# EAGLE board kicker-v2.2 (EAGLE 9.1.1)
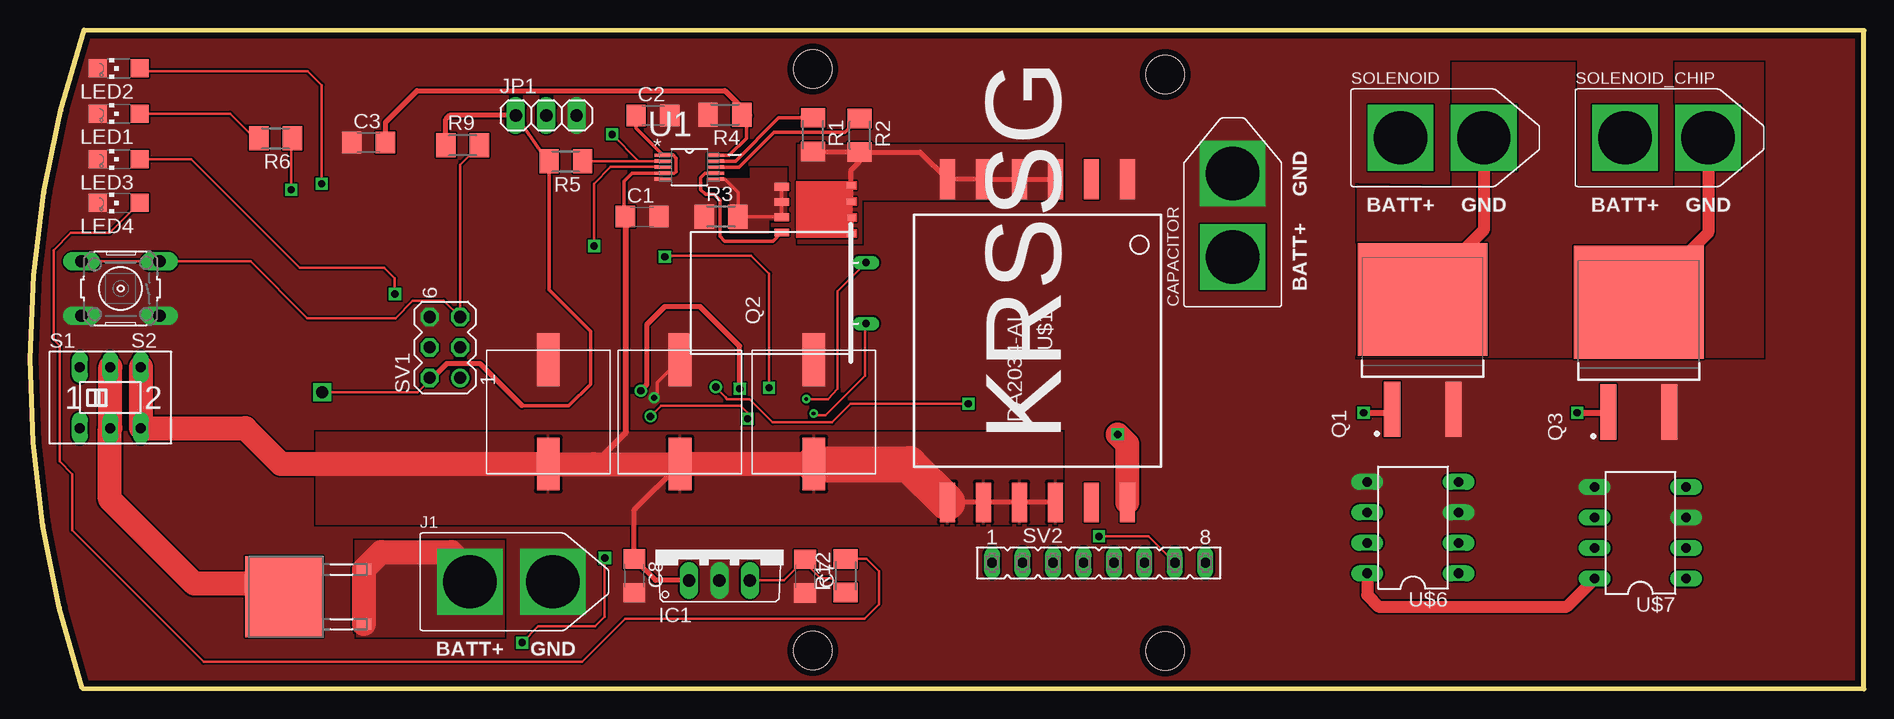
[diagram p0: board, top side]
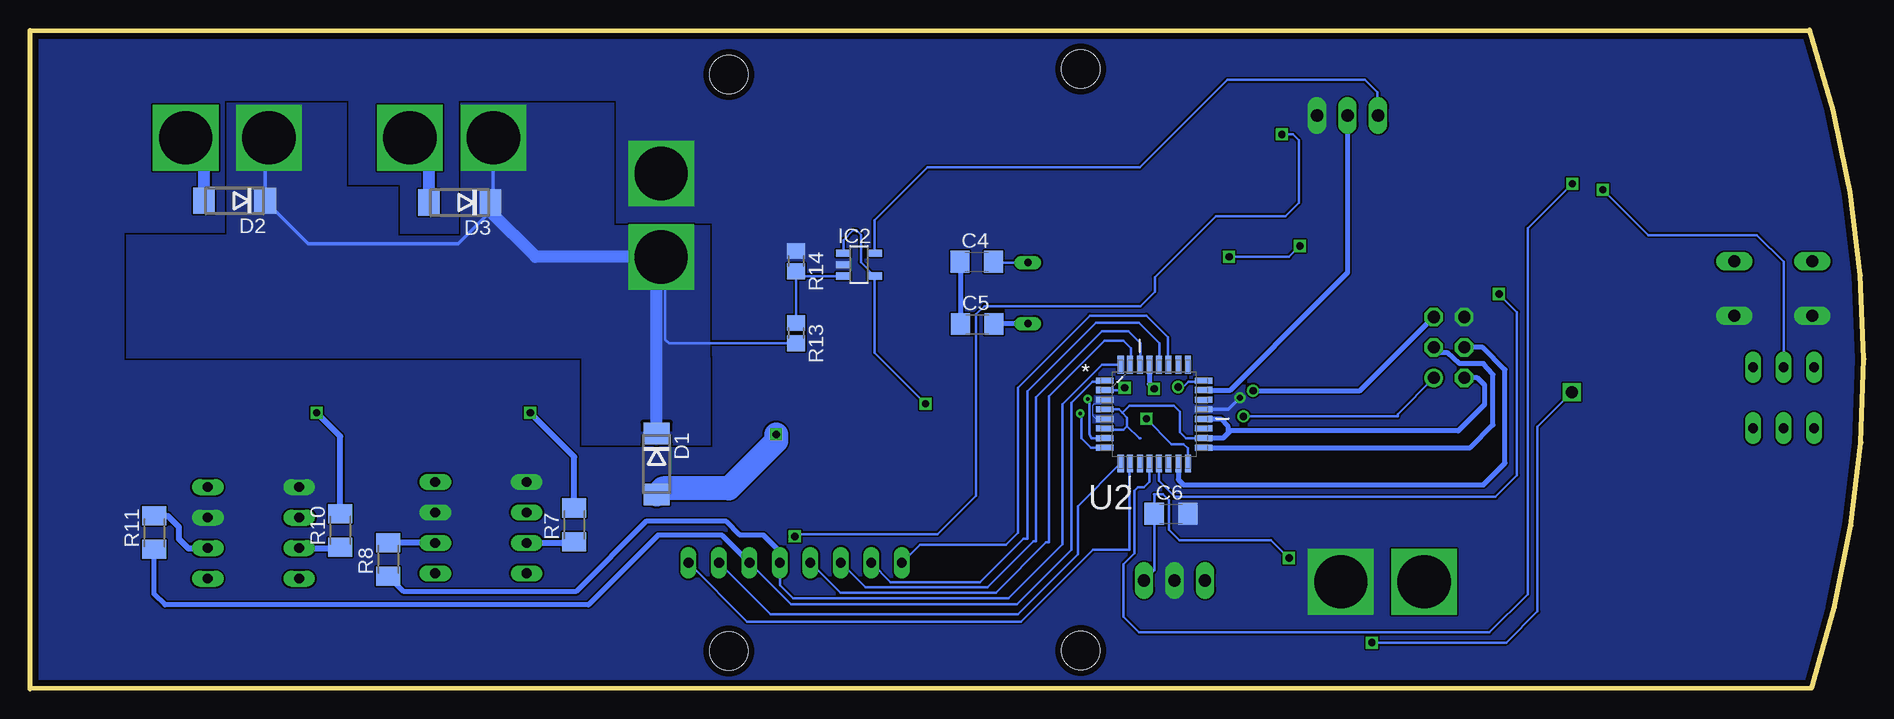
[diagram p1: board, bottom side, seen from below]

Size 152.87 x 54.9 mm. Coordinates in mm from the lower left corner, seen from the top.
Outline: 4.37,0.05 152.87,0 152.87,54.85 4.52,54.9 arc37 4.37,0.05
Copper layers (1*16): Top 0.09mm / dielectric 2.2mm / Bottom 0.09mm
Design rules "default *": minimum track width 10mil, minimum drill 0.15mm, track to track 0.15mm, track to pad 0.15mm, pad to pad 0.15mm, via to via 0.15mm, smd to smd 0.15mm, copper to edge 0.5mm, drill to drill 8mil, minimum pad ring 10mil, minimum via ring 8mil, stop-mask expansion 4mil, vias tented up to drill 0mil, thermal gap 10mil
Holes 3.2 mm at 65.27,3.2 65.27,51.65 94.62,51.2 94.62,3.15

## Footprints (pad centres in the part's own frame; a part is rotated, then mirrored left to right if it is on the bottom)
C1206 = smd 1.6 x 1.8: 1 -1.4,0; 2 1.4,0
XT-60 = drill 4.446 square: BATT 0,4.154; GND 0,11.092
DO214AA = smd 1.8 x 2.2: A 2.55,0; C -2.55,0
TO220V = drill 1.016 long: 1 -2.54,-2.54; 2 0,-2.54; 3 2.54,-2.54
SOT23-5 = smd 0.6 x 1.2: 1 -0.95,-1.306; 2 0,-1.306; 3 0.95,-1.306; 4 0.95,1.306; 5 -0.95,1.306
1X03 = drill 1.016 long: 1 -2.54,0; 2 0,0; 3 2.54,0
CHIPLED_1206 = smd 1.5 x 1.5: A 0,-1.75; C 0,1.75
TO254P1524X457-3N-2-V = smd 4.6 x 1.35: 1 -4.575,2.55; 3 -4.575,-2.55 | smd 9.4 x 10.8: 2 4.575,0
Q = drill 0.61 long: 1 -2.54,-7.62; 2 2.54,-7.62
M1206 = smd 1.6 x 2: 1 -1.4,0; 2 1.4,0
R0805 = smd 1.3 x 1.5: 1 -0.85,0; 2 0.85,0
A68-A31 = drill 0.813 long: 1 -2.54,-2.54; 2 0,-2.54; 3 2.54,-2.54; 4 -2.54,2.54; 5 0,2.54; 6 2.54,2.54
B3F-10XX = drill 1.016 long: 1 -3.251,2.261; 2 3.251,2.261; 3 -3.251,-2.261; 4 3.251,-2.261
MA03-2 = drill 1.016: 1 -2.54,-1.27 | drill 1.016 octagon: 2 -2.54,1.27; 3 0,-1.27; 4 0,1.27; 5 2.54,-1.27; 6 2.54,1.27
FE08 = drill 0.813 long: 1 -8.89,0; 2 -6.35,0; 3 -3.81,0; 4 -1.27,0; 5 1.27,0; 6 3.81,0; 7 6.35,0; 8 8.89,0
SOP50P490X110-10N = smd 1.397 x 0.279: 1 -2.184,0.991; 2 -2.184,0.508; 3 -2.184,0; 4 -2.184,-0.508; 5 -2.184,-0.991; 6 2.184,-0.991; 7 2.184,-0.508; 8 2.184,0; 9 2.184,0.508; 10 2.184,0.991
QFP80P900X900X120-32N = smd 1.473 x 0.508: 1 -4.115,2.794; 2 -4.115,2.007; 3 -4.115,1.194; 4 -4.115,0.406; 5 -4.115,-0.406; 6 -4.115,-1.194; 7 -4.115,-2.007; 8 -4.115,-2.794; 17 4.115,-2.794; 18 4.115,-2.007; 19 4.115,-1.194; 20 4.115,-0.406; 21 4.115,0.406; 22 4.115,1.194; 23 4.115,2.007; 24 4.115,2.794 | smd 0.508 x 1.473: 9 -2.794,-4.115; 10 -2.007,-4.115; 11 -1.194,-4.115; 12 -0.406,-4.115; 13 0.406,-4.115; 14 1.194,-4.115; 15 2.007,-4.115; 16 2.794,-4.115; 25 2.794,4.115; 26 2.007,4.115; 27 1.194,4.115; 28 0.406,4.115; 29 -0.406,4.115; 30 -1.194,4.115; 31 -2.007,4.115; 32 -2.794,4.115
TO228P1042X238-3N = smd 0.889 x 1.219: 1 -2.286,-6.502; 3 2.286,-6.502 | smd 6.731 x 6.502: 2 0,0.152
DA2034-AL = smd 3.3 x 1.27: P$1 -13.46,7.5; P$2 -13.46,4.5; P$3 -13.46,1.5; P$4 -13.46,-1.5; P$5 -13.46,-4.5; P$6 -13.46,-7.5; P$7 13.46,-7.5; P$8 13.46,-4.5; P$9 13.46,-1.5; P$10 13.46,1.5; P$11 13.46,4.5; P$12 13.46,7.5
SVP_F12 = smd 1.9 x 4.4: + 5.15,-0.8; - 5.15,-9.5
PG-TDSON-8 = smd 0.5 x 0.7: D1 -0.12,5.78; D2 1.25,5.75; D3 2.58,5.81; D4 3.9,5.79 | smd 0.65 x 1.2: G 3.81,0; S1 0,0; S2 1.27,0; S3 2.54,0
DIL08 = drill 0.813 long: 1 -3.81,-3.81; 2 -1.27,-3.81; 3 1.27,-3.81; 4 3.81,-3.81; 5 3.81,3.81; 6 1.27,3.81; 7 -1.27,3.81; 8 -3.81,3.81

## Placement (x,y rotation side)
C1  10uF  [C1206]  51.03,39.35 0 top
C2  10uF  [C1206]  51.93,47.79 0 top
C3  100pF  [C1206]  28.23,45.54 0 top
C4  10uF  [C1206]  73.96,35.59 0 bottom
C5  10uF  [C1206]  73.91,30.39 0 bottom
C6  10uF  [C1206]  57.76,14.59 0 bottom
C7  10uF  [C1206]  64.61,9.39 270 top
C8  10uF  [C1206]  50.37,9.41 270 top
CAPACITOR  XT-60BATT_LABEL  [XT-60]  100.26,31.84 0 top
D1  [DO214AA]  100.64,18.73 270 bottom
D2  [DO214AA]  135.82,40.67 180 bottom
D3  [DO214AA]  117.06,40.52 180 bottom
IC1  7818TV  [TO220V]  57.47,11.57 0 top
IC2  MCP601OT  [SOT23-5]  83.77,35.35 270 bottom
J1  XT-60BATT_LABEL  [XT-60]  32.51,8.92 270 top
JP1  [1X03]  43.04,47.78 0 top
LED1  [CHIPLED_1206]  7.39,47.93 90 top
LED2  [CHIPLED_1206]  7.39,51.7 90 top
LED3  [CHIPLED_1206]  7.39,44.12 90 top
LED4  [CHIPLED_1206]  7.39,40.49 90 top
Q1  IGB50N60T  [TO254P1524X457-3N-2-V]  116.09,27.87 90 top
Q2  [Q]  62.07,32.98 90 top
Q3  IGB50N60T  [TO254P1524X457-3N-2-V]  134.11,27.64 90 top
R1  60.4K  [M1206]  65.27,46.18 270 top
R2  43K  [M1206]  69.17,46.13 270 top
R3  8m  [M1206]  57.61,39.35 0 top
R4  2.49K  [M1206]  57.93,47.85 180 top
R5  100K  [M1206]  44.67,43.95 180 top
R6  [M1206]  20.48,45.87 180 top
R7  [M1206]  107.5,13.66 90 bottom
R8  [M1206]  123,10.78 90 bottom
R9  [M1206]  36.07,45.28 0 top
R10  [M1206]  127,13.2 90 bottom
R11  [M1206]  142.5,13.02 90 bottom
R12  [M1206]  67.99,9.42 90 top
R13  [R0805]  89.02,29.65 270 bottom
R14  [R0805]  89.02,35.65 270 bottom
S1  [A68-A31]  6.7,24.26 0 top
S2  [B3F-10XX]  7.55,33.36 180 top
SOLENOID  XT-60BATT_LABEL  [XT-60]  110.1,45.92 270 top
SOLENOID_CHIP  XT-60BATT_LABEL  [XT-60]  128.8,45.92 270 top
SV1  [MA03-2]  34.59,28.45 90 top
SV2  [FE08]  89.09,10.5 0 top
U1  LT3750EMSPBF  [SOP50P490X110-10N]  54.97,43.47 0 top
U2  ATMEGA328P-AU  [QFP80P900X900X120-32N]  59.16,22.89 0 bottom
U3  [TO228P1042X238-3N]  21.35,7.67 90 top
U$1  DA2034-AL  [DA2034-AL]  83.98,29 270 top
U$2  56uF  [SVP_F12]  59.33,17.93 180 top
U$3  56uF  [SVP_F12]  48.36,17.93 180 top
U$4  56uF  [SVP_F12]  70.49,17.93 180 top
U$5  BSC520N  [PG-TDSON-8]  62.67,41.84 270 top
U$6  HCPL-3120-300E  [DIL08]  115.28,13.43 90 top
U$7  HCPL-3120-300E  [DIL08]  134.24,13 90 top

## Library data of the parts
C1-C8 R1-R14 = resistor
CAPACITOR J1 SOLENOID SOLENOID_CHIP = XT-60
D1-D3 = diode
IC1 IC2 = linear
JP1 = pinhead
LED1-LED4 = led
Q1 Q3 = IGB50N60T
Q2 = special
S1 = switch
S2 = switch-omron; MPN: B3F-1000; OC_FARNELL: 176432; OC_NEWARK: 36M3542
SV1 = con-lstb; OC_FARNELL: unknown; OC_NEWARK: unknown
SV2 = con-lsta; OC_FARNELL: unknown; OC_NEWARK: unknown
U1 = LT3750-element; MPN: LT3750EMS#PBF; OC_FARNELL: 1273500; OC_NEWARK: 57M8591; PACKAGE: MSOP-10; SUPPLIER: Linear Technology
U2 = Atmel_By_element14_Batch_1-00; MPN: ATMEGA328P-AU; OC_FARNELL: 1715486; OC_NEWARK: 14R4631; PACKAGE: TQFP-32; SUPPLIER: Atmel
U3 = LP38690DT-3.3; MPN: LP38690DT-3.3; OC_FARNELL: 1008048; OC_NEWARK: 41K7439; PACKAGE: TO-252; SUPPLIER: National Semiconductor
U$1 = inductor-coilcraft-2
U$2-U$4 = SVP_F12
U$5 = BSC520N
U$6 U$7 = adafruit

## Nets
5V: C6.1 C7.1 IC1.3 IC2.5 JP1.1 R5.2 R9.1 R12.1 SV1.2 U2.4 U2.6 U2.18 U2.20
CAP+: CAPACITOR.BATT D1.C D2.C D3.C R13.2 SOLENOID.BATT SOLENOID_CHIP.BATT
CAP_ADC: IC2.1 IC2.4 U2.24
CAP_RAW: IC2.3 R13.1 R14.2
CHARGE: U1.3 U2.2
DONE: R5.1 SV2.7 U1.2 U2.9
GATE_LT: U1.7 U$5.G
GND: C1.2 C2.2 C3.1 C6.2 C7.2 C8.2 CAPACITOR.GND IC1.2 IC2.2 J1.GND JP1.3 LED1.C LED2.C LED3.C LED4.C Q1.3 Q3.3 R3.1 R4.2 R14.1 S2.1 S2.2 SV1.6 U1.5 U2.3 U2.5 U2.21 U$1.P$1 U$2.- U$3.- U$4.- U$6.3 U$6.5 U$7.3 U$7.5
KICK_JUDGE: JP1.2 U2.23
MISO: SV1.1 U2.16
MOSI: SV1.4 U2.15
N$1: D1.A U$1.P$12
N$2: R7.1 U$6.7
N$4: C3.2 R4.1 U1.10
N$7: R6.1 S1.2 S1.5 U3.2
N$9: Q1.1 R7.2
N$10: R8.2 U$6.2
N$13: LED1.A R6.2
N$14: R10.1 U$7.7
N$15: Q3.1 R10.2
N$16: C4.1 C5.1
N$17: R11.2 U$7.2
N$19: LED2.A U2.12
N$20: LED3.A U2.13
N$21: LED4.A R12.2
RDCM: R2.1 U1.8
RESET: R9.2 S2.3 S2.4 SV1.5 U2.29
RVOUT: R1.1 U1.9
RXD: SV2.3 U2.30
SCK: SV1.3 U2.17
SCL: SV2.2 U2.28
SDA: SV2.1 U2.27
SINK: R1.2 R2.2 U$1.P$3 U$1.P$4 U$1.P$5 U$1.P$6 U$5.D1 U$5.D2 U$5.D3 U$5.D4
SOLENOID: D3.A Q1.2 SOLENOID.GND
SOLENOID_CHIP: D2.A Q3.2 SOLENOID_CHIP.GND
SOURCE: R3.2 U1.6 U$5.S1 U$5.S2 U$5.S3
TRIGGER: R8.1 SV2.5 U2.32
TRIGGER_CHIP: R11.1 SV2.6 U2.1
TXD: SV2.4 U2.31
V_TRANS: C1.1 C2.1 C8.1 IC1.1 S1.3 S1.6 U1.1 U1.4 U$1.P$7 U$1.P$8 U$1.P$9 U$1.P$10 U$2.+ U$3.+ U$4.+
VIN: J1.BATT U3.1 U3.3
VTRANS: U$6.8 U$7.8
WAVEFORM: SV2.8 U2.10
XTAL_1: C4.2 Q2.2 U2.7
XTAL_2: C5.2 Q2.1 U2.8

## Tracks (layer width: path | path; a pad name or v marks a point on that pad's centre or on a via)
5V  (via drill 0.6, 1)
  Top 0.2: IC1.3 62.85,9.03 C7.1 64.61,10.51 65.92,9.2 66.81,9.2 R12.1 | v47.92,10.9 47.92,6 47.12,5.2 42.37,5.2 v41.02,3.85 | v24.37,24.7 32.32,24.7 33.77,26.15
  Top 0.3: JP1.1 42.85,44.37 R5.2 43.27,33.25 46.72,29.8 46.72,25.4 44.92,23.6 41.02,23.6
  Top 0.4: 41.02,23.6 37.52,27.1 34.72,27.1 33.77,26.15 33.53,25.91 SV1.2
  Top 0.406: R9.1 34.67,47.45 35,47.78 JP1.1
  Bottom 0.2: 60.36,9.38 IC1.3 59.16,9.88 C6.1 59.16,16.19 59.17,16.2 58.42,16.2 57.92,15.7 57.92,13.25 57.07,12.4 49.42,12.4 v47.92,10.9 | U2.4 62.11,23.3 61.82,23 | 61.82,23 61.42,22.6 61.42,21.9 | 61.42,21.9 61.72,21.6 63.17,21.6 U2.6 | 60.32,20.88 60.4,20.88 61.42,21.9 | U2.18 56.5,20.88 57.02,21.4 57.02,23.1 57.52,23.6 61.22,23.6 61.82,23 | v41.02,3.85 29.82,3.85 27.22,6.45 27.22,21.85 v24.37,24.7 | IC2.5 82.46,39.06 78.07,43.45 60.37,43.45 53.07,50.75 41.62,50.75 40.57,49.7 40.57,47.85 JP1.1
  Bottom 0.4: U2.20 53.6,22.48 53.02,21.9 53.02,21.3 | 53.02,21.3 53.42,20.9 55.02,20.9 U2.18 | 53.02,21.3 52.82,21.5 33.82,21.5 31.62,23.7 31.62,25.3 32.23,25.91 SV1.2
CAP+
  Bottom 0.2: R13.2 99.62,28.8 99.92,29.1 99.92,35.65 CAPACITOR.BATT
  Bottom 0.3: SOLENOID.BATT 114.25,40.78 D3.C 114.51,39.76 117.17,37.1 129.7,37.1 D2.C 133.27,45.61 SOLENOID_CHIP.BATT
  Bottom 1: D1.C 100.64,35.62 CAPACITOR.BATT 110.74,35.99 114.51,39.76
  pour Bottom (no thermals): 96.17,27.6 96.17,38.6 104.17,38.6 104.17,48.8 116.97,48.8 116.97,37.7 122.17,37.7 122.17,41.8 126.47,41.8 126.47,48.8 136.47,48.8 136.47,37.8 144.87,37.8 144.87,27.6
  pour Bottom: 96.17,27.6 96.17,20.3 106.87,20.3 106.87,27.6
CAP_ADC  (via drill 0.6)
  Top 0.2: v78.22,23.75 68.42,23.75 66.87,22.2 61.92,22.2 59.97,24.15 58.12,24.15 57.97,24.3 v57.17,25.15
  Bottom 0.2: IC2.1 85.07,37.39 84.27,38.2 83.97,38.2 83.62,37.85 83.62,35.56 IC2.4 82.46,27.99 v78.22,23.75 | v57.17,25.15 56.77,25.15 56.32,25.6 55.12,25.6 U2.24
CAP_RAW
  Bottom 0.2: R13.1 R14.2 88.62,34.4 IC2.3
CHARGE  (via drill 0.6)
  Top 0.2: v61.62,25.1 61.62,34.6 60.12,36.1 53.02,36.1 v52.92,36 | v47.02,36.9 47.02,42.1 48.42,43.5 52.75,43.5 U1.3
  Bottom 0.2: U2.2 61.82,24.9 v61.62,25.1 | v52.92,36 47.92,36 v47.02,36.9
DONE  (via drill 0.6)
  Top 0.2: R5.1 46.09,43.98 U1.2 50.74,43.98 v48.52,46.2 | v89.12,12.7 93.24,12.7 SV2.7
  Bottom 0.2: v48.52,46.2 47.62,46.2 47.12,45.7 47.12,40.5 48.22,39.4 54.02,39.4 59.12,34.3 59.12,33.1 60.32,31.9 73.32,31.9 74.02,31.2 74.02,16.1 77.22,12.9 88.92,12.9 v89.12,12.7 | U2.9 65.52,15.21 65.52,11.2 70.52,6.2 91.14,6.2 SV2.7
GATE_LT
  Top 0.3: U1.7 56.28,42.96 55.92,42.6 55.92,41.6 56.32,41.2 57.02,41.2 57.52,40.7 57.52,37.7 57.92,37.3 61.94,37.3 U$5.G
GND  (via drill 0.5)
  Top 0.3: U$2.- 52.27,25.52 52.27,24.5 v52.02,24.25
  Bottom 0.1: U2.5 64,22.48 64.27,22.75 64.27,23.65 64.17,23.75 63.6,23.75 U2.3
  Bottom 0.3: v52.02,24.25 52.97,23.3 U2.21
  pour Top (rank 3, no thermals): 10.47,60.35 -10.38,60.55 -10.38,-5.15 164.07,-5.1 164.07,60.6
  pour Bottom (rank 3, no thermals): -15.63,63.35 -15.63,-11.35 168.77,-10.45 168.77,64.25
KICK_JUDGE
  Bottom 0.4: U2.23 52.82,24.9 45.39,32.33
  Bottom 0.406: JP1.2 43.04,34.68 45.39,32.33
MISO  (via drill 0.6)
  Top 0.2: v59.82,22.5 59.82,23 59.22,23.6 52.62,23.6 v51.72,22.7
  Bottom 0.2: U2.16 56.36,20.05 56.72,20.4 57.72,20.4 v59.82,22.5 | v51.72,22.7 38.87,22.7 38.87,22.9 SV1.1
MOSI
  Bottom 0.4: U2.15 57.15,17.43 56.72,17 31.72,17 29.92,18.8 29.92,26.6 31.77,28.45 SV1.4
N$1  (via drill 0.6)
  Top 2: U$1.P$12 91.48,20.39 v90.67,21.2
  Bottom 2: v90.67,21.2 90.67,20.65 94.62,16.7 100.12,16.7 D1.A
N$2
  Bottom 0.5: U$6.7 107.6,12.16 R7.1
N$3
  pour Top (no thermals): 118.57,41.9 118.57,52.2 128.77,52.2 128.77,41.8 137.17,41.8 137.17,52.2 144.47,52.2 144.47,27.6 110.67,27.6 110.67,42
N$4
  Top 0.3: U1.10 58.28,44.46 59.72,45.9 59.72,47.46 R4.1
  Top 0.406: 59.72,47.46 60.02,47.76 57.93,49.85 32.27,49.85 29.63,47.21 C3.2
N$7  (via drill 0.6)
  Top 0.2: v21.77,41.6 21.77,45.76 R6.1
  Top 2: U3.2 22.3,8.77 13.69,8.77 6.67,15.8 6.67,21.69 S1.2 S1.5
  Bottom 0.2: S1.5 6.7,35.58 8.92,37.8 17.97,37.8 v21.77,41.6
N$9  (via drill 0.6)
  Top 0.5: v111.17,23 113.24,23 Q1.1
  Bottom 0.5: R7.2 107.5,19.33 v111.17,23
N$10
  Bottom 0.5: U$6.2 122.98,12.16 R8.2
N$13
  Top 0.2: LED1.A 16.69,47.93 19.27,45.35 19.27,45.68 R6.2
N$14
  Bottom 0.5: U$7.7 127.07,11.73 R10.1
N$15  (via drill 0.6)
  Top 0.5: v128.97,23 131.49,23 Q3.1
  Bottom 0.5: R10.2 127,21.03 v128.97,23
N$16
  Bottom 0.406: C4.1 75.31,35.59 C5.1
N$17
  Bottom 0.5: R11.2 141.39,14.42 140.47,13.5 140.47,12.5 139.67,11.7 138.08,11.7 U$7.2
N$19  (via drill 0.6)
  Top 0.2: v24.32,42.1 24.32,50.3 23.17,51.45 9.39,51.45 LED2.A
  Bottom 0.2: U2.12 59.56,17.25 60.02,16.8 60.52,16.8 60.82,16.5 60.82,11.3 61.72,10.4 61.72,6 60.42,4.7 31.22,4.7 28.02,7.9 28.02,38.4 v24.32,42.1
N$20  (via drill 0.6)
  Top 0.2: v30.42,32.9 30.42,34.2 29.52,35.1 22.47,35.1 13.45,44.12 LED3.A
  Bottom 0.2: U2.13 58.75,17.33 57.42,16 30.72,16 28.92,17.8 28.92,31.4 v30.42,32.9
N$21
  Top 0.2: R12.2 69.75,10.82 70.77,9.8 70.77,7.05 69.57,5.85 49.62,5.85 46.02,2.25 14.47,2.25 3.52,13.2 3.52,17.9 2.47,18.95 2.47,28.6 1.97,29.1 1.97,36.55 3.42,38 6.65,38 LED4.A
RDCM
  Top 0.3: U1.8 59.09,43.47 62.02,46.4 67.94,46.4 R2.1
RESET  (via drill 0.6)
  Top 0.2: R9.2 35.86,43.67 SV1.5 34.5,32.35 31.92,32.35 30.47,30.9 23.12,30.9 18.39,35.62 S2.3 S2.4
  Top 0.406: v59.17,25 59.17,28.55 55.87,31.85 52.92,31.85 51.42,30.35 51.42,25.35 v50.92,24.85
  Bottom 0.406: U2.29 59.56,25.4 v59.17,25 | v50.92,24.85 42,24.85 SV1.5
RVOUT
  Top 0.3: U1.9 58.79,43.98 62.42,47.6 65.25,47.6 R1.1
RXD
  Bottom 0.2: U2.30 60.32,27.04 60.32,28.8 61.32,29.8 63.52,29.8 69.02,24.3 69.02,12.3 69.22,12.3 73.07,8.45 83.23,8.45 SV2.3
SCK
  Bottom 0.4: U2.17 32.82,20.1 30.92,22 30.92,26.2 31.72,27.1 33.72,27.1 34.72,28 35.41,28 SV1.3
SCL
  Bottom 0.2: U2.28 58.72,27.04 58.72,28.8 60.42,30.5 64.02,30.5 69.72,24.8 69.72,12.5 70.07,12.5 73.67,8.9 81.14,8.9 SV2.2
SDA
  Bottom 0.2: U2.27 58.02,27.06 58.02,29.3 59.82,31.1 64.52,31.1 70.52,25.1 70.52,13 71.52,12 78.7,12 SV2.1
SINK
  Top 0.406: U$1.P$3 U$1.P$4 U$1.P$5 U$1.P$6 74.21,44.73 R2.2 | U$5.D4 68.48,37.94 U$5.D3 68.42,39.26 U$5.D2 68.45,40.59 U$5.D1 68.45,43.23 69.12,43.9 69.12,44.68 R2.2 | R2.2 65.27,44.73 R1.2
  pour Top (no thermals): 64.02,37.1 64.02,45.4 86.12,45.4 86.12,40.7 69.32,40.7 69.32,37.1
SOLENOID
  Top 1: SOLENOID.GND 121.19,38.22 116.17,33.2 116.17,32.52 Q1.2
  Bottom 1: D3.A 119.61,44.34 SOLENOID.GND
SOLENOID_CHIP
  Top 1: SOLENOID_CHIP.GND 139.89,38 Q3.2
  Bottom 1: D2.A 138.37,44.4 SOLENOID_CHIP.GND
SOURCE
  Top 0.3: U1.6 57.94,42.48 59.02,41.4 R3.2 62.62,39.35 U$5.S3 U$5.S2 U$5.S1
  pour Top (no thermals): 58.32,41.8 58.32,38 61.62,38 61.62,39.1 63.12,39.1 63.12,43.4 60.02,43.4 60.02,42.5 56.42,42.5 56.42,41.8
TRIGGER
  Bottom 0.2: U2.32 63.52,27 66.82,23.7 66.82,12.05 71.32,7.55 89.27,7.55 90.37,8.65 90.37,11.43 90.36,11.44
  Bottom 0.4: SV2.5 90.36,11.44 91.72,12.8 93.72,12.8 93.72,12.85 94.82,13.95 101.52,13.95 107.37,8.1 121.72,8.1 R8.1
TRIGGER_CHIP
  Bottom 0.2: U2.1 63.35,25.6 64.32,25.6 66.07,23.85 66.07,11.6 70.62,7.05 89.45,7.05 SV2.6
  Bottom 0.4: SV2.6 95.2,12.8 100.52,12.8 106.32,7 141.62,7 142.52,7.9 142.52,11.6 R11.1
TXD
  Bottom 0.2: U2.31 61.12,27.05 61.12,28.4 61.72,29 63.32,29 67.92,24.4 67.92,12.2 68.17,12.2 72.37,8 85.32,8 SV2.4
V_TRANS
  Top 0.3: 49.52,39.46 49.52,42.3 50.18,42.96 U1.4 53.68,42.96 53.87,43.1 53.87,44.2 53.62,44.5 52.84,44.5 U1.1 50.53,46.72 C2.1
  Top 0.4: IC1.1 52.15,9.03 C8.1 50.37,14.92 U$2.+
  Top 0.406: U$1.P$10 U$1.P$9 U$1.P$8 U$1.P$7
  Top 0.5: 49.52,39.46 C1.1 49.63,21.34 47.02,18.73
  Top 2: U$4.+ U$2.+ 47.02,18.73 U$3.+ 43.19,18.75 20.92,18.75 17.95,21.72 S1.3 S1.6
  Top 3: U$4.+ 73.29,18.73 U$1.P$7
  pour Top: 23.82,21.4 23.82,13.7 86.12,13.7 86.12,21.4
VIN
  Top 2: U3.1 U3.3 29.29,11.4 35.12,11.4 36.66,9.86 J1.BATT
  pour Top (no thermals): 27.12,4.7 27.12,12.4 39.52,12.4 39.52,4.3 27.22,4.3 27.22,4.7
VTRANS
  Top 1: U$6.8 111.47,7.8 112.42,6.85 128.09,6.85 U$7.8
WAVEFORM
  Bottom 0.2: U2.10 61.22,18.72 61.22,11.6 64.27,11.6 70.27,5.6 93.08,5.6 SV2.8
XTAL_1  (via drill 0.3)
  Top 0.2: v64.72,24.15 66.52,24.15 67.32,25 67.32,33.15 Q2.2
  Bottom 0.2: Q2.2 72.49,35.52 C4.2 | U2.7 64.4,20.88 64.57,21.2 64.57,24 v64.72,24.15
  Bottom 0.406: 72.56,35.52 C4.2
XTAL_2  (via drill 0.3)
  Top 0.2: Q2.1 69.62,30.37 69.62,26.1 66.32,22.8 65.47,22.8 v65.32,22.95
  Bottom 0.2: U2.8 64.41,20.1 65.22,20.9 65.22,22.55 65.22,22.7 65.22,22.85 v65.32,22.95
  Bottom 0.406: Q2.1 72.51,30.44 C5.2

## Text on the board
tPlace: KRSSG